# Altium PCB switch_pcb.PcbDoc
Units mm, origin at the board's own origin, x right, y up, seen from the top; angles counter-clockwise.
Board outline 93 x 63 mm, 2 copper layers (Top Layer, Bottom Layer); 25 components, 15 nets, 79 pads, 0 vias.
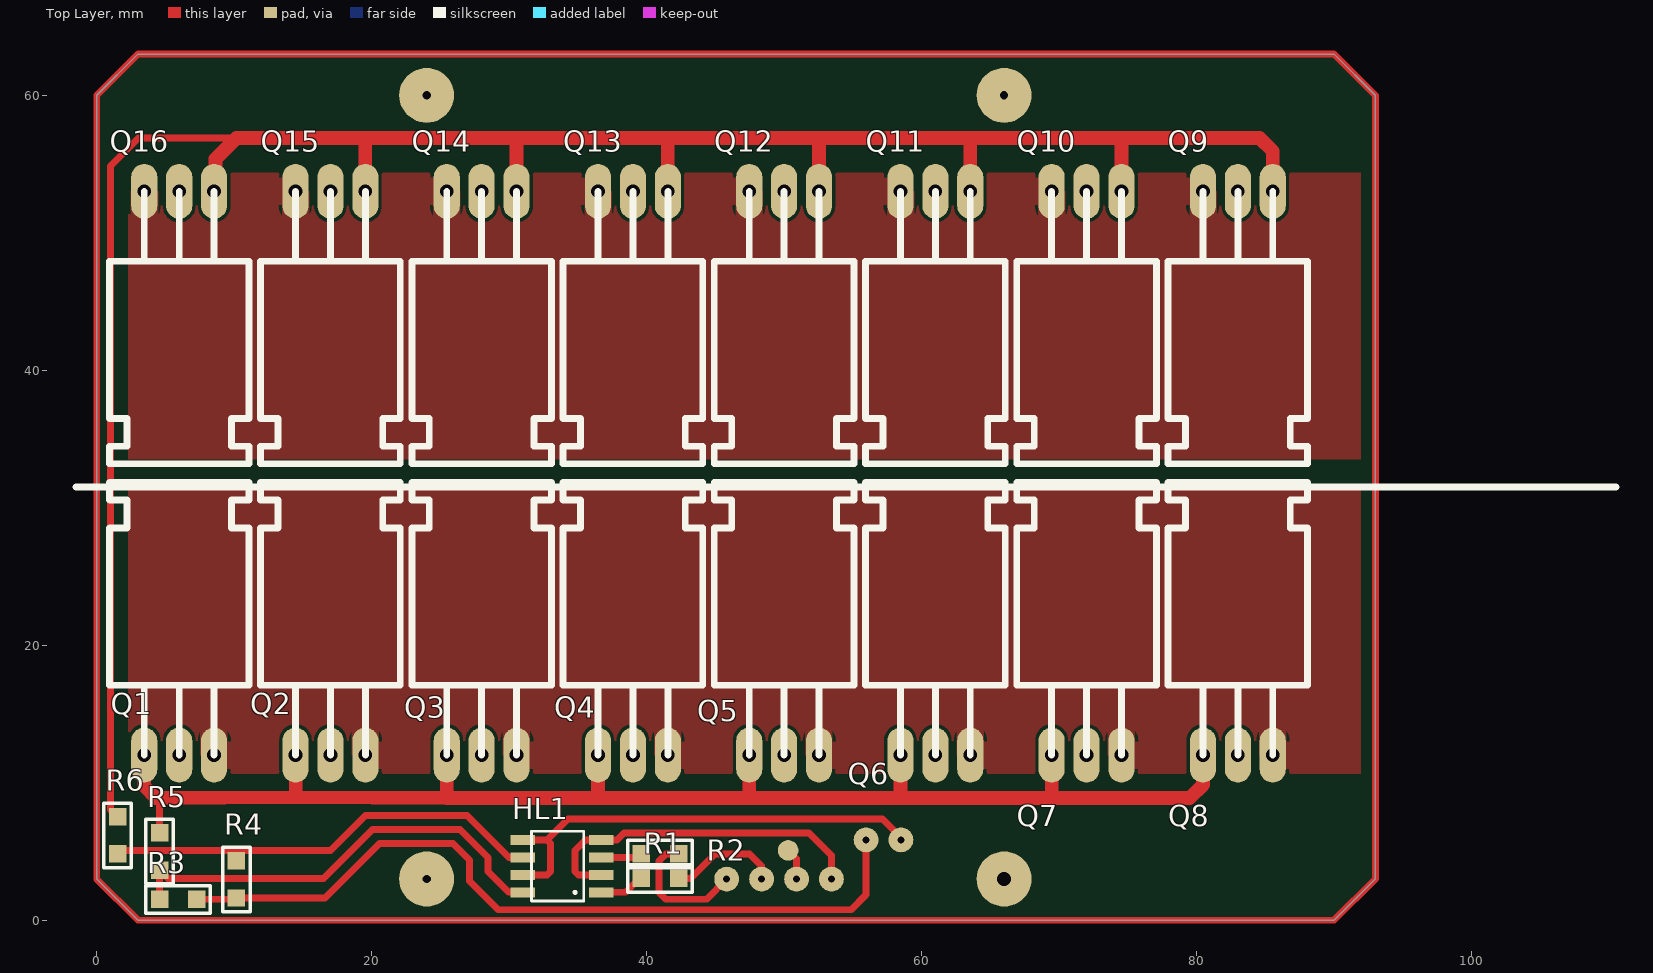
[diagram p0: Top Layer view]
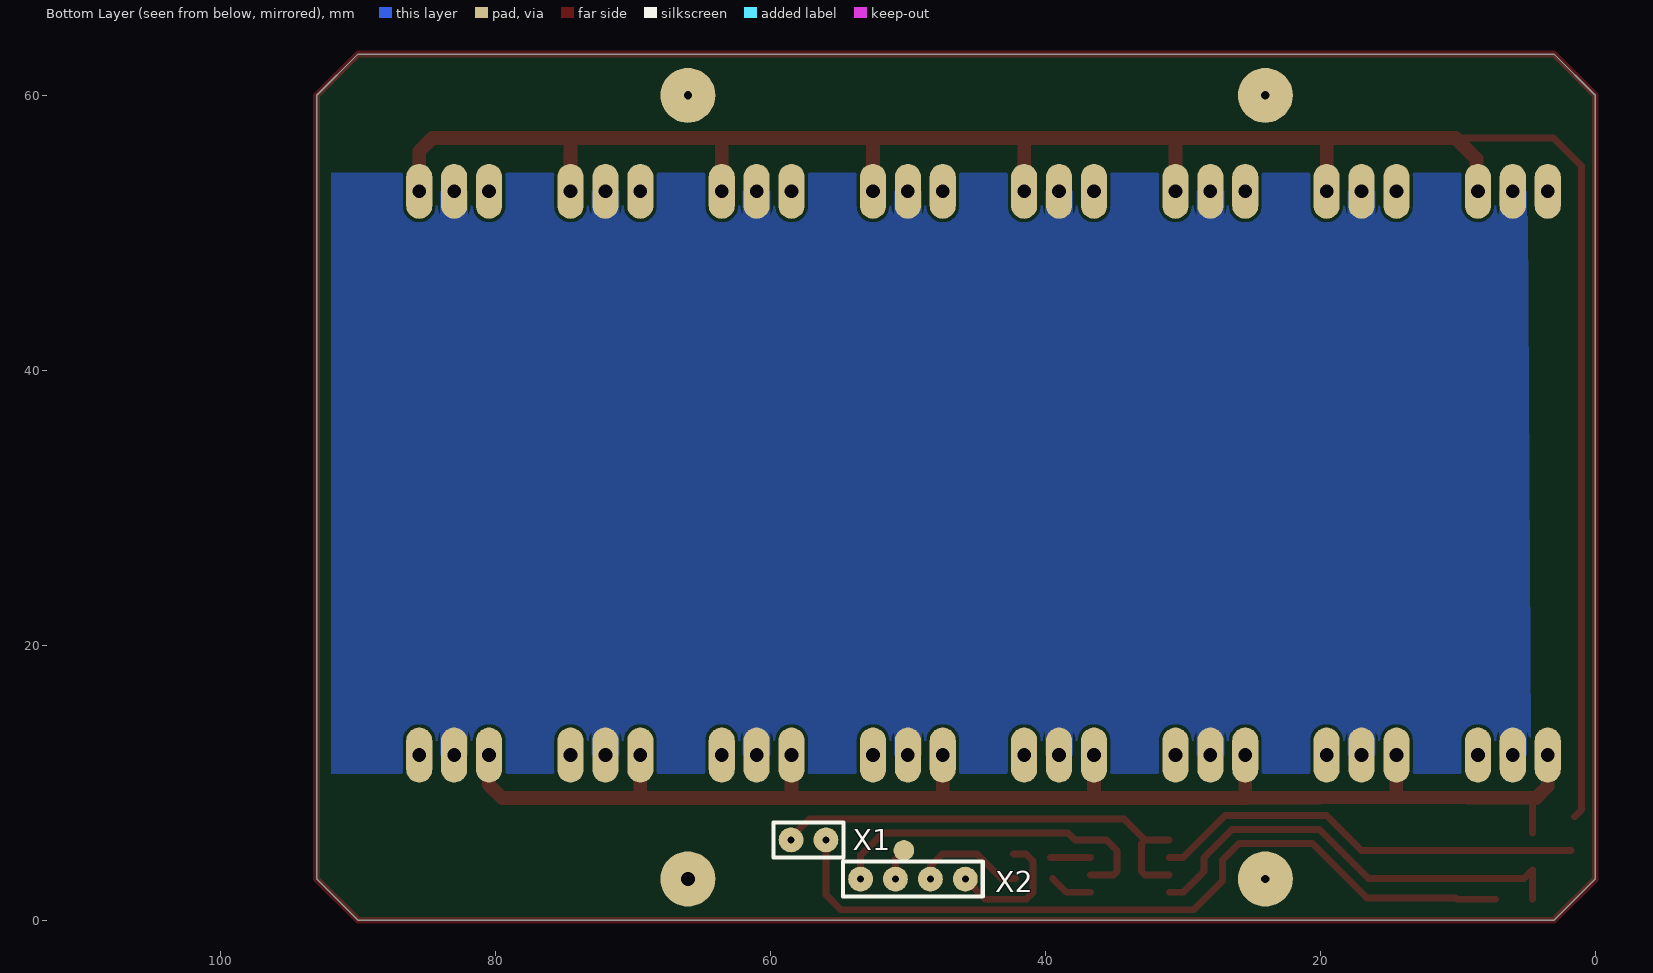
[diagram p1: Bottom Layer view, seen from below]
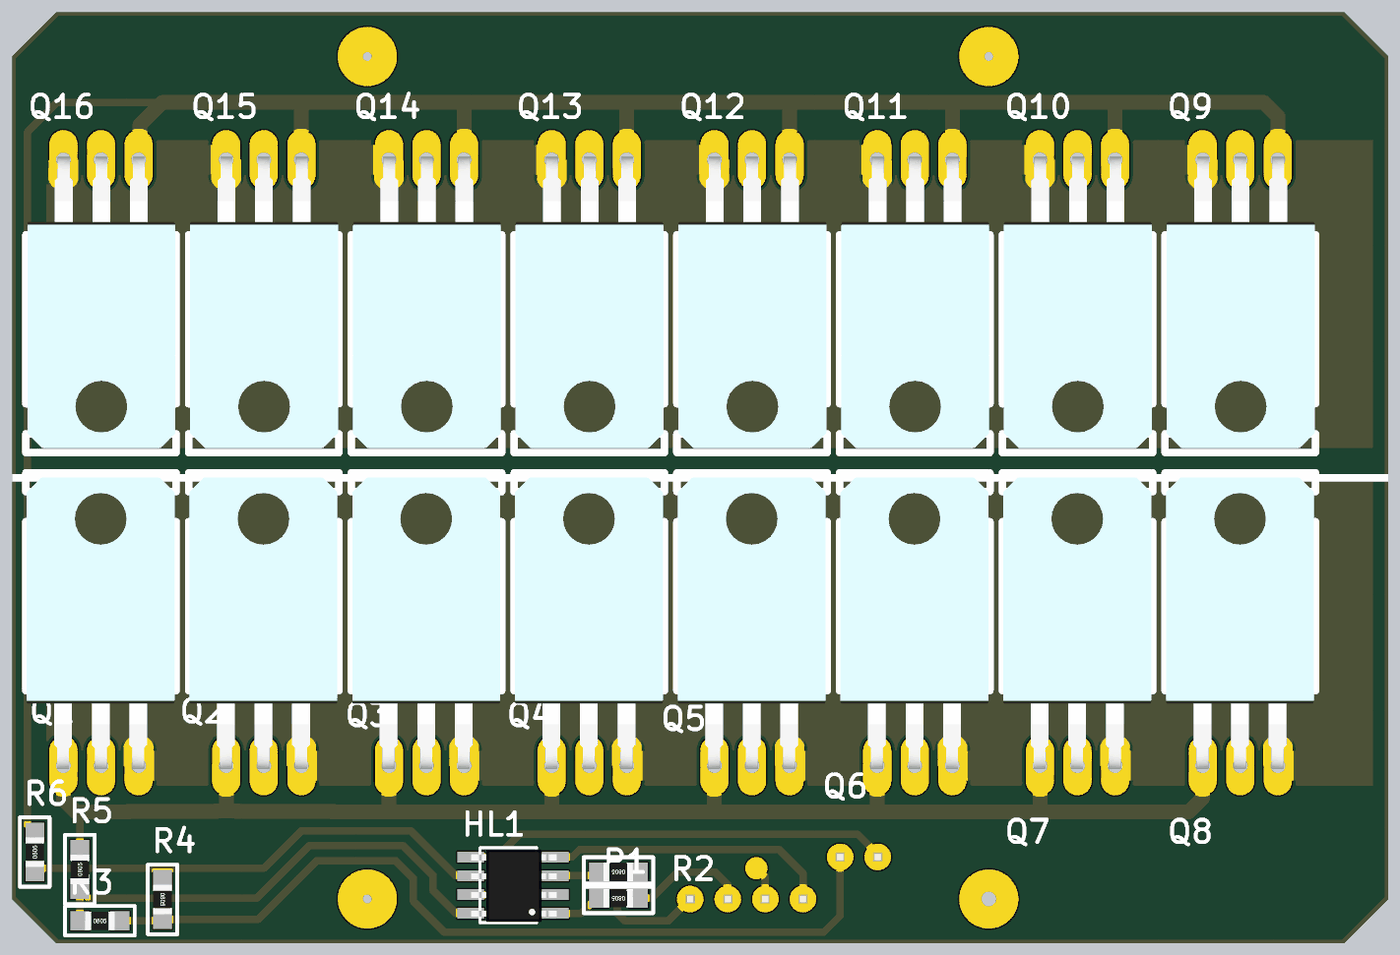
[diagram p2: 3D render of the assembled board from above, using the file's embedded part models]

## Layer stack, top to bottom
Top Solder: solder mask 0.0102, Solder Resist, Dk 3.5
Top Layer: signal copper 0.0356
Dielectric 1: dielectric 0.32, FR-4, Dk 4.8
Bottom Layer: signal copper 0.0356
Bottom Solder: solder mask 0.0102, Solder Resist, Dk 3.5

## Board outline
3,0 0,3 0,60 3,63 90,63 93,60 93,3 90,0

## Design rules (kind name [scope] priority, off if disabled: settings)
Clearance [All] p1: gap=0.254
PolygonConnect [All] p1: connectstyle=Relief reliefconductorwidth=2 reliefentries=4 polygonreliefangle="90 Angle" airgapwidth=0.254
RoutingVias [All] p1: holewidth=0.711 width=1.27 viastyle="Through Hole" minholewidth=0.711 minwidth=1.27 maxholewidth=0.711 maxwidth=1.27
SolderMaskExpansion [All] p1: expansion=0.102
Width [All] p1: maxlimit=3 minlimit=0.254 preferedwidth=0.35
30 further rules are at their usual default settings.

## Components (designator, comment, footprint, x,y, rotation, side; value= is the part's Value field where it differs from the comment)
HL1 "MOCD207" SO8 36.703,2.032 r90 top
Q1 "NCE85H21" NCE85H21 3.46,12.016 r0 top
Q2 "NCE85H21" NCE85H21 14.46,12.016 r0 top
Q3 "NCE85H21" NCE85H21 25.46,12.016 r0 top
Q4 "NCE85H21" NCE85H21 36.46,12.016 r0 top
Q5 "NCE85H21" NCE85H21 47.46,12.016 r0 top
Q6 "NCE85H21" NCE85H21 58.46,12.016 r0 top
Q7 "NCE85H21" NCE85H21 69.46,12.016 r0 top
Q8 "NCE85H21" NCE85H21 80.46,12.016 r0 top
Q9 "NCE85H21" NCE85H21 85.54,53.016 r180 top
Q10 "NCE85H21" NCE85H21 74.54,53.016 r180 top
Q11 "NCE85H21" NCE85H21 63.54,53.016 r180 top
Q12 "NCE85H21" NCE85H21 52.54,53.016 r180 top
Q13 "NCE85H21" NCE85H21 41.54,53.016 r180 top
Q14 "NCE85H21" NCE85H21 30.54,53.016 r180 top
Q15 "NCE85H21" NCE85H21 19.54,53.016 r180 top
Q16 "NCE85H21" NCE85H21 8.54,53.016 r180 top
R1 "150" R0805 42.324,3.048 r180 top
R2 "150" R0805 42.324,4.826 r180 top
R3 "10K" R0805 4.572,1.524 r0 top
R4 "10K" R0805 10.16,4.318 r270 top
R5 "100" R0805 4.572,3.65 r90 top
R6 "100" R0805 1.524,4.826 r90 top
X1 "Pins 2x2.54" "Pins 2x2.54" 55.956,5.842 r0 bottom
X2 "Pins 4x2.54" "Pins 4x2.54" 45.822,2.997 r0 bottom

## Footprints (in the part's own frame and the unit in brackets; to place one, negate y for a bottom-side part, rotate by r counter-clockwise, add the part's x,y. Pads: shape width x height; smd on the part's side, far side on the other; paste and mask are expansions set on the pad)
NCE85H21 [mm]
  oval 1.9x4 hole 1: 1(0,0) 2(2.54,0) 3(5.08,0)
  silkscreen extent -2.54,0 7.62,19.81, body extent -2.48,-0.2 7.52,19.5, height 5
"Pins 2x2.54" [mm]
  round 1.8 hole 0.5: 1(0,0) 2(2.54,0)
  silkscreen extent -1.27,-1.27 3.81,1.27, body extent -1.27,-1.27 3.81,1.27, height 8.81
"Pins 4x2.54" [mm]
  round 1.8 hole 0.5: 1(0,0) 2(2.54,0) 3(5.08,0) 4(7.62,0)
  silkscreen extent -1.27,-1.27 8.89,1.27, body extent -1.27,-1.27 8.89,1.27, height 8.81
R0805 [mm]
  rect 1.27x1.27 smd: 1(0,0) 2(2.7,0)
  silkscreen extent -1,-1 3.7,1, body extent 0.35,-0.62 2.35,0.63, height 0.61
SO8 [mm]
  rect 0.72x1.8 smd: 1(0,0) 2(1.27,0) 3(2.54,0) 4(3.81,0) 5(3.81,5.715) 6(2.54,5.715) 7(1.27,5.715) 8(0,5.715)
  silkscreen extent -0.64,1.27 4.44,5.08, body extent -0.58,-0.1 4.32,5.68, height 1.45

## Part data
HL1: library part Optopara_MOCD207
R1 R2 R3 R4 R5 R6: library part Resistor

## Free pads (board coordinates)
  round 4 hole 0.6: 1(24,3) 2(24,60) 3(66,60)
  round 4 hole 1: 4(66,3)
  round 1.5 all layers, no hole: 5(50.292,5.08)

## Nets (pads, with @x,y where several pads share a name; then routed paths per layer and width w, separated by ;. In a path a pad name is that pad's centre, name@x,y a point inside that pad or via, vN(x,y) a via of type N, cw(c..) or ccw(c..) an arc to the next point about the centre after c; other vN are vias at no path point)
+50V: R3.2 R4.2 X1.1 | length 57.6
  Top Layer w0.5: R3.2 R4.2@10.066,1.524 ; R4.2 16.604,1.618 20.574,5.588 25.908,5.588 27.115,4.381 27.115,2.857 29.21,0.762 54.864,0.762 55.956,1.854 X1.1
FAN: pad.5 X2.3 | length 2.3
  Top Layer w0.5: pad.5 50.902,4.47 X2.3
GATE_B: Q1.1 Q2.1 Q3.1 Q4.1 Q5.1 Q6.1 Q7.1 Q8.1 R5.2 | length 103.2
  Top Layer w0.5: R5.2 4.572,8.636
  Top Layer w1: Q1.1 3.46,9.748 4.318,8.89 14.469,8.947 ; Q2.1 14.469,8.947 ; Q3.1 25.46,8.89 ; Q4.1 36.46,8.89 ; Q5.1 47.46,8.89 ; Q6.1 58.46,8.89 ; Q7.1 69.46,8.89 ; Q8.1 80.46,9.848 79.502,8.89 69.46,8.89 ; 14.469,8.947 25.46,8.89 ; 25.46,8.89 36.46,8.89 ; 36.46,8.89 47.46,8.89 ; 47.46,8.89 58.46,8.89 ; 58.46,8.89 69.46,8.89
GATE_C: Q9.1 Q10.1 Q11.1 Q12.1 Q13.1 Q14.1 Q15.1 Q16.1 R6.2 | length 163.7
  Top Layer w0.5: R6.2 1.016,8.034 1.016,54.864 3.048,56.896 10.16,56.896
  Top Layer w1: Q16.1 8.636,53.112 8.636,55.372 10.16,56.896 84.582,56.896 85.54,55.938 Q9.1 ; Q15.1 19.54,56.878 ; Q14.1 30.54,56.836 ; Q13.1 41.54,56.758 ; Q12.1 52.54,56.858 ; Q11.1 63.54,56.856 ; Q10.1 74.54,56.778
GND: HL1.2 HL1.4 X2.4 | length 25.1
  Top Layer w0.5: HL1.2 35.052,3.302 34.798,3.556 34.798,5.08 35.56,5.842 HL1.4 37.846,5.842 38.354,6.35 51.816,6.35 53.442,4.724 X2.4
GNDA: HL1.5 HL1.7 X1.2 | length 33.4
  Top Layer w0.5: HL1.7 32.766,3.302 33.02,3.556 33.02,5.588 32.766,5.842 ; HL1.5 32.766,5.842 ; X1.2 58.496,6.02 57.15,7.366 34.29,7.366 32.766,5.842
KEY1: R1.1 X2.2 | length 8.3
  Top Layer w0.5: R1.1@42.164,3.048 R1.1 43.18,3.048 44.958,4.826 47.498,4.826 48.362,3.962 X2.2
KEY2: R2.1 X2.1 | length 9.7
  Top Layer w0.5: R2.1 41.402,4.826 40.894,4.318 40.894,2.032 41.402,1.524 44.348,1.524 X2.1
NetHL1_1: HL1.1 R1.2 | length 3.2
  Top Layer w0.5: HL1.1 38.448,2.032 R1.2@39.464,3.048
NetHL1_3: HL1.3 R2.2 | length 2.9
  Top Layer w0.5: HL1.3 R2.2@39.624,4.572
NetHL1_6: HL1.6 R4.1 R6.1 | length 31.5
  Top Layer w0.5: R6.1@1.778,5.08 17.018,5.08 19.558,7.62 26.924,7.62 29.972,4.572 HL1.6
NetHL1_8: HL1.8 R3.1 R5.1 | length 32.8
  Top Layer w0.5: R3.1 R5.1 5.174,3.048 16.51,3.048 20.066,6.604 26.416,6.604 28.448,4.572 28.448,3.556 29.972,2.032 HL1.8
NetPAD1_1: Q1.3 Q2.3 Q3.3 Q4.3 Q5.3 Q6.3 Q7.3 Q8.3
NetPAD3_1: Q9.3 Q10.3 Q11.3 Q12.3 Q13.3 Q14.3 Q15.3 Q16.3
P_NET: Q1.2 Q2.2 Q3.2 Q4.2 Q5.2 Q6.2 Q7.2 Q8.2 Q9.2 Q10.2 Q11.2 Q12.2 Q13.2 Q14.2 Q15.2 Q16.2
copper on no net: | length 305
  Top Layer w0.5: 0,3 3,0 90,0 93,3 93,60 90,63 3,63 0,60 0,3

## Polygon pours and split planes (outlines as drawn)
P_NET on Bottom Layer "Top Layer-No Net" (solid, remove dead copper, pour order 0): 4.675,10.668 91.948,10.668 91.948,54.356 4.929,54.356
NetPAD1_1 on Top Layer "Top Layer-No Net" (solid, remove dead copper, pour order 4): 2.286,10.668 2.286,31.496 91.948,31.496 91.948,10.668
NetPAD3_1 on Top Layer "Top Layer-No Net" (solid, remove dead copper, pour order 2): 2.286,54.356 2.286,33.528 91.694,33.528 91.948,33.528 91.948,54.356

## Silkscreen, mask and mechanical layers (free items; w line width, h text height)
Top Overlay:
  lines w0.5: -1.5,31.5 110.5,31.5

## Dimensions
0.92,47.936 to 0.92,17.096 on Mechanical 15
0.92,17.096 to 88.08,17.096 on Mechanical 15